# EAGLE board ftPwrDrive_2v9a (EAGLE 9.0.0), part 1 of 2
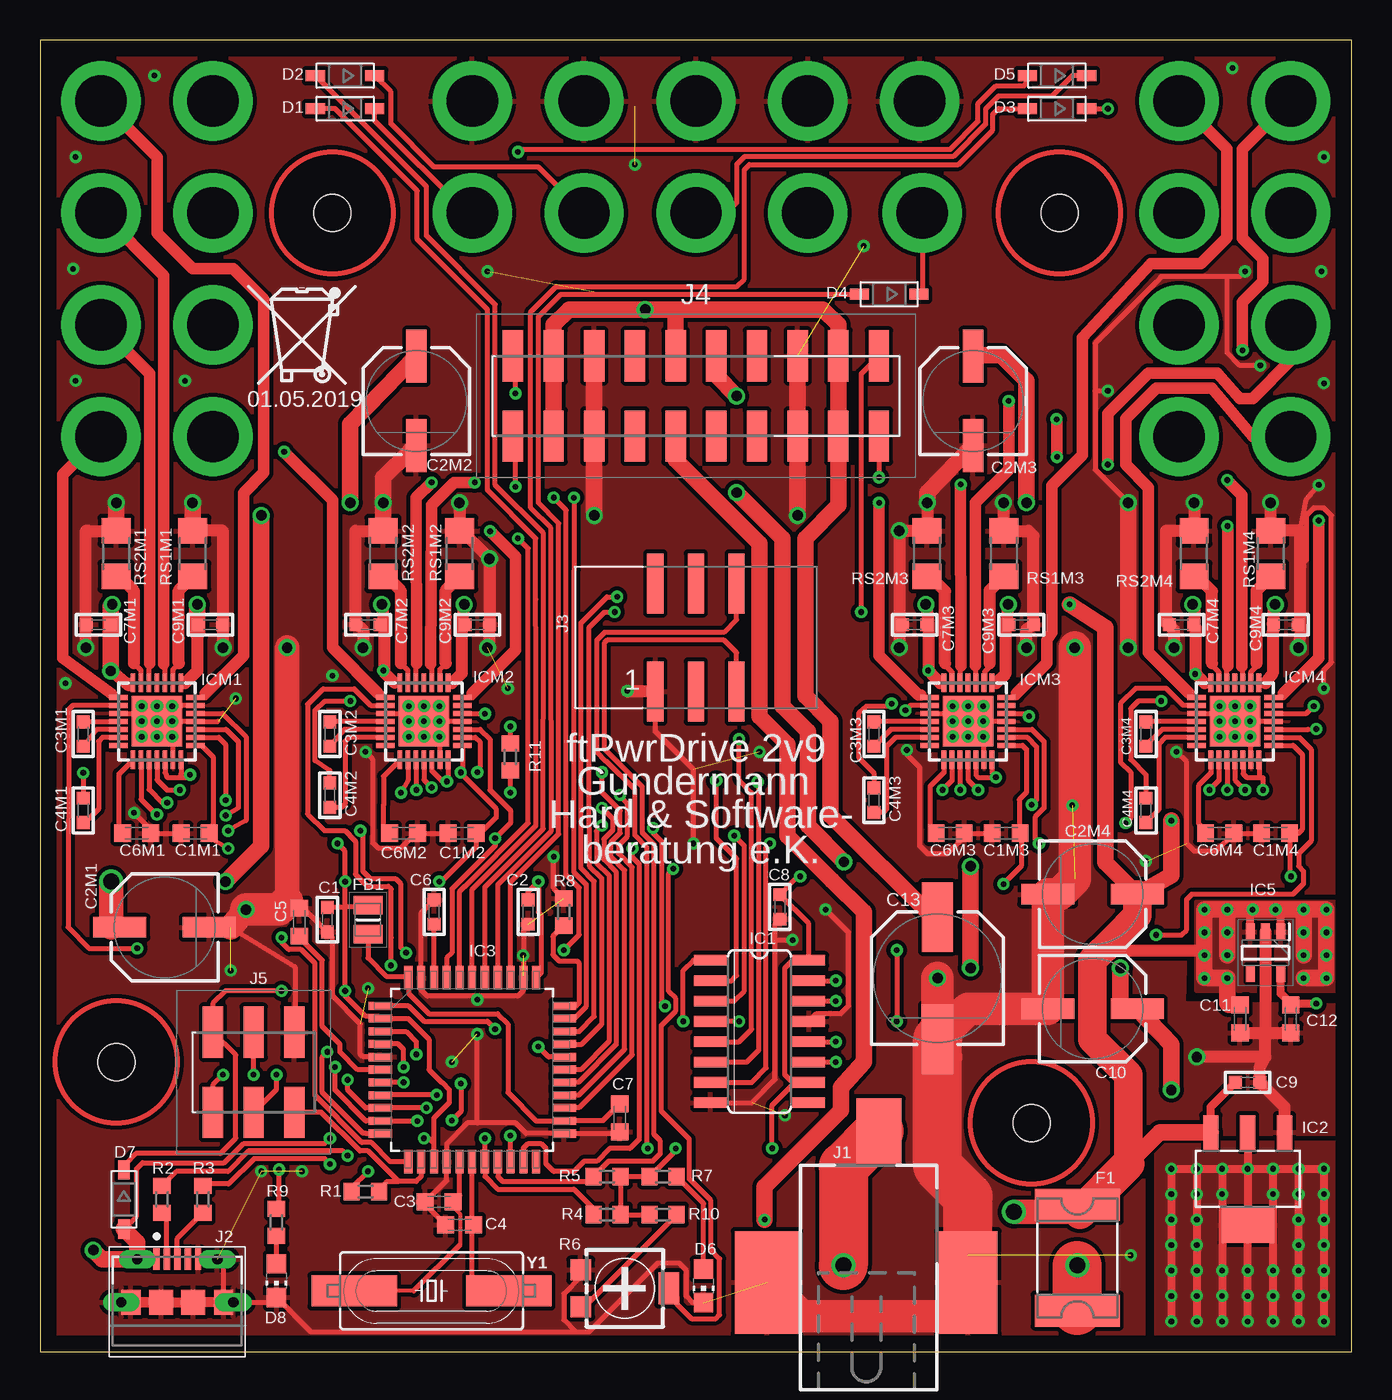
[diagram p0: board, top side]
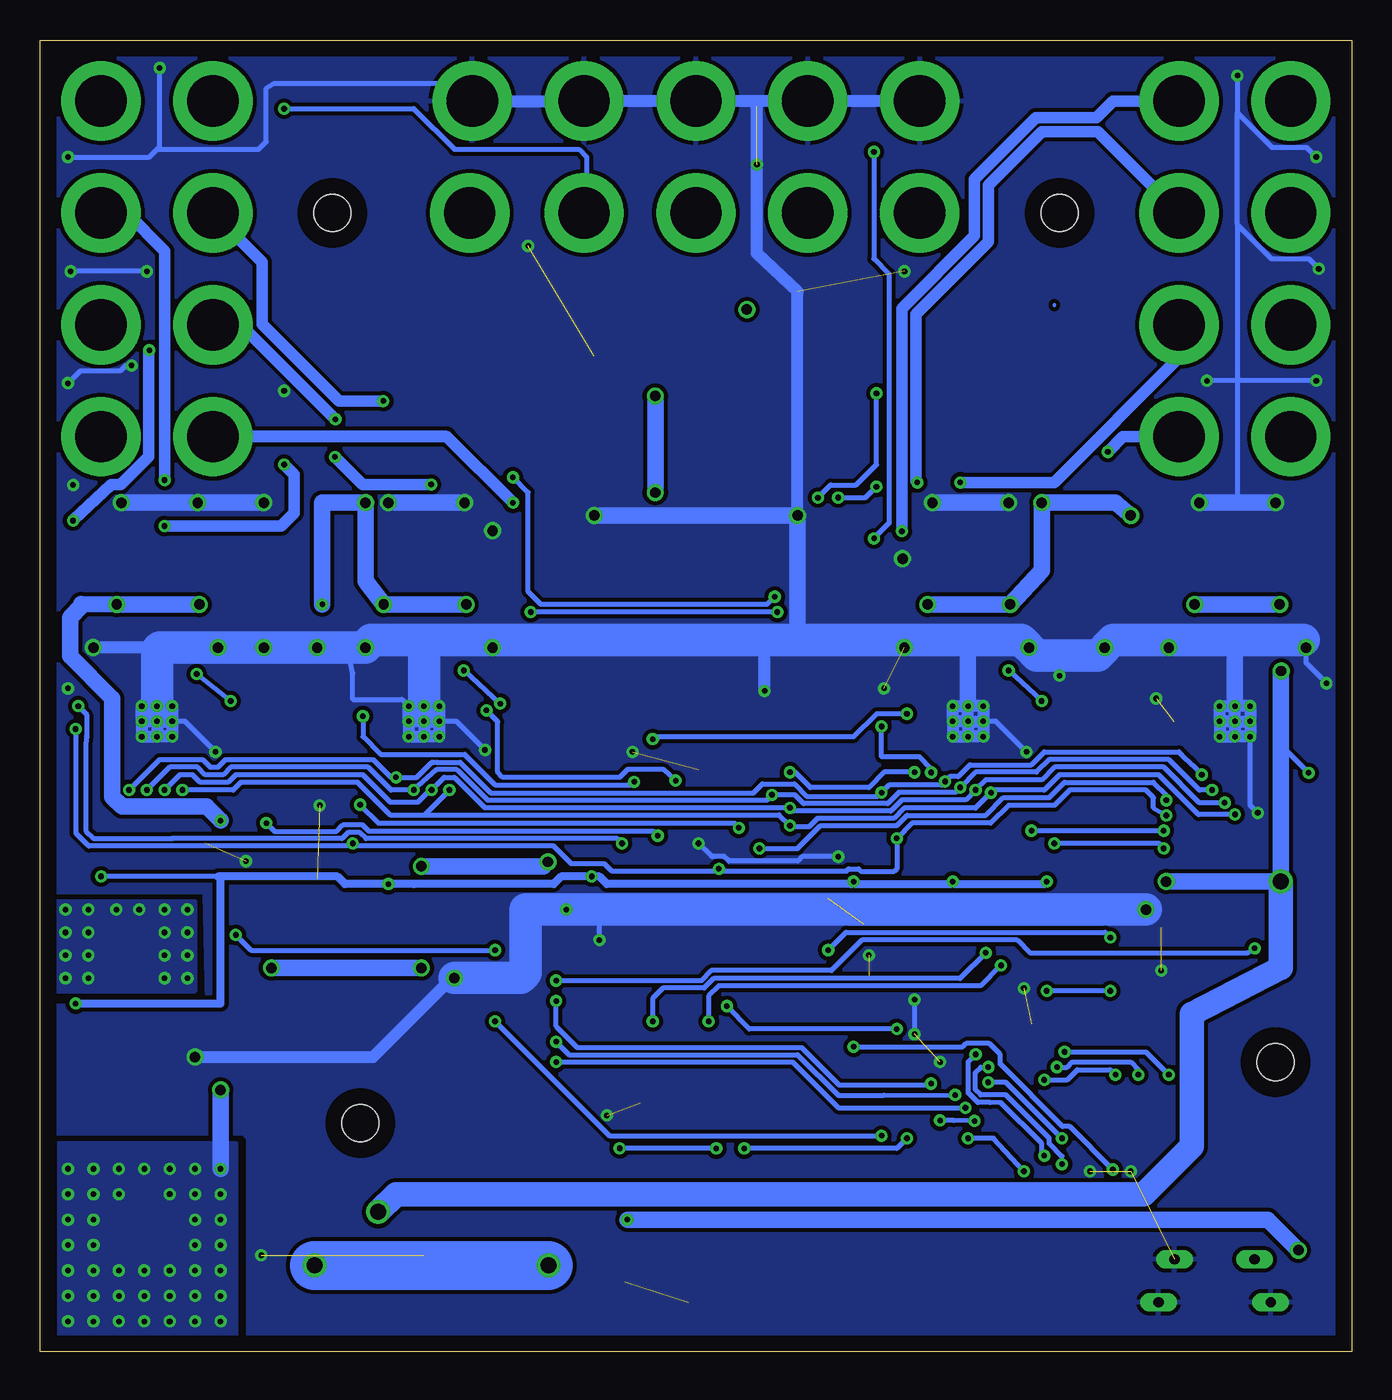
[diagram p1: board, bottom side, seen from below]

Size 81.92 x 81.92 mm. Coordinates in mm from the lower left corner, seen from the top.
Outline: 0,0 81.92,0 81.92,81.92 0,81.91 0,0
Copper layers (1*16): Top 0.035mm / dielectric 1.5mm / Bottom 0.035mm
Design rules "default": minimum track width 6mil, minimum drill 0.35mm, track to track 6mil, track to pad 6mil, pad to pad 6mil, via to via 6mil, smd to smd 6mil, copper to edge 40mil, drill to drill 6mil, minimum pad ring 10mil, minimum via ring 8mil, stop-mask expansion 4mil, vias tented up to drill 0mil, thermal gap 10mil
Net classes: 2 gnd: width 0.254 mm, drill 0.61 mm, clearance 0.254 mm; 3 usbvcc: width 0.254 mm, drill 0.61 mm, clearance 0.254 mm; 4 aref: width 0.254 mm, drill 0.61 mm, clearance 0.254 mm
Holes 2.3 mm at 18.26,71.12 63.66,71.12 61.91,14.29 4.76,18.1

## Footprints (pad centres in the part's own frame; a part is rotated, then mirrored left to right if it is on the bottom)
BUNDHUELSE = drill 3.2 pad 4.953: P$1 0,0
C0603 = smd 0.8 x 0.8: 1 -0.762,0; 2 0.762,0
C0603K = smd 1.05 x 1.08: 1 -0.875,0; 2 0.875,0
CSV-D = smd 3.302 x 1.27: + -2.794,0; - 2.794,0
CSV-E/F = smd 4.318 x 1.93: + -3.81,0; - 3.81,0
SOD-123 = smd 1.2 x 0.7: A 1.85,0; C -1.85,0
CHIP-LED0805 = smd 1.2 x 1.2: A 0,-1.05; C 0,1.05
2920L = smd 2 x 5.3: 1 -3.3,0; 2 3.3,0
BEADC2016X130N = smd 1.15 x 1.8: 1 -0.9,0; 2 0.9,0
SO16 = smd 0.66 x 2.032: 1 -4.445,-3.073; 2 -3.175,-3.073; 3 -1.905,-3.073; 4 -0.635,-3.073; 5 0.635,-3.073; 6 1.905,-3.073; 7 3.175,-3.073; 8 4.445,-3.073; 9 4.445,3.073; 10 3.175,3.073; 11 1.905,3.073; 12 0.635,3.073; 13 -0.635,3.073; 14 -1.905,3.073; 15 -3.175,3.073; 16 -4.445,3.073
SOT223 = smd 0.95 x 2.15: 1 -2.3,-2.9; 2 0,-2.9; 3 2.3,-2.9 | smd 3.25 x 2.15: 4 0,2.9
QFP80P1200X1200X120-44N = smd 1.473 x 0.508: 1 -5.74,3.988; 2 -5.74,3.2; 3 -5.74,2.388; 4 -5.74,1.6; 5 -5.74,0.787; 6 -5.74,0; 7 -5.74,-0.787; 8 -5.74,-1.6; 9 -5.74,-2.388; 10 -5.74,-3.2; 11 -5.74,-3.988; 23 5.74,-3.988; 24 5.74,-3.2; 25 5.74,-2.388; 26 5.74,-1.6; 27 5.74,-0.787; 28 5.74,0; 29 5.74,0.787; 30 5.74,1.6; 31 5.74,2.388; 32 5.74,3.2; 33 5.74,3.988 | smd 0.508 x 1.473: 12 -3.988,-5.74; 13 -3.2,-5.74; 14 -2.388,-5.74; 15 -1.6,-5.74; 16 -0.787,-5.74; 17 0,-5.74; 18 0.787,-5.74; 19 1.6,-5.74; 20 2.388,-5.74; 21 3.2,-5.74; 22 3.988,-5.74; 34 3.988,5.74; 35 3.2,5.74; 36 2.388,5.74; 37 1.6,5.74; 38 0.787,5.74; 39 0,5.74; 40 -0.787,5.74; 41 -1.6,5.74; 42 -2.388,5.74; 43 -3.2,5.74; 44 -3.988,5.74
SOT95P280X100-5N = smd 1.05 x 0.55: 1 -1.3,0.95; 2 -1.3,0; 3 -1.3,-0.95; 4 1.3,-0.95; 5 1.3,0.95
QFN28ET = smd 1.15 x 0.3: 1 -2.4,1.5; 2 -2.4,1; 3 -2.4,0.5; 4 -2.4,0; 5 -2.4,-0.5; 6 -2.4,-1; 7 -2.4,-1.5; 15 2.4,-1.5; 16 2.4,-1; 17 2.4,-0.5; 18 2.4,0; 19 2.4,0.5; 20 2.4,1; 21 2.4,1.5 | smd 0.3 x 1.15: 8 -1.5,-2.4; 9 -1,-2.4; 10 -0.5,-2.4; 11 0,-2.4; 12 0.5,-2.4; 13 1,-2.4; 14 1.5,-2.4; 22 1.5,2.4; 23 1,2.4; 24 0.5,2.4; 25 0,2.4; 26 -0.5,2.4; 27 -1,2.4; 28 -1.5,2.4 | smd 3.15 x 3.15: EXP 0,0
RASM7X2 = smd 4 x 6.4: P$1 -6.2,-3.6 | smd 3.7 x 6.4: P$2 6.35,-3.6 | smd 2.8 x 4.06: P$3 0.8,5.85
AMPHENOL_10118194-0001LF_0 = smd 0.4 x 1.35: 1 -1.3,2.615; 2 -0.65,2.615; 3 0,2.615; 4 0.65,2.615; 5 1.3,2.615 | drill 0.635 pad 1.067 long: 6 -2.5,2.615; 7 2.5,2.615; 8 -3.5,-0.085; 11 3.5,-0.085 | smd 1.2 x 1.55: 8-2 -2.9,-0.085; 11-2 2.9,-0.085 | smd 1.5 x 1.55: 9 -1,-0.085; 10 1,-0.085
SMTHEADER06 = smd 1 x 3.75: 1 -5.08,-3.375; 2 -5.08,3.375; 3 -2.54,-3.375; 4 -2.54,3.375; 5 0,-3.375; 6 0,3.375
SMD_HEADER_2X10 = smd 1.27 x 3.2: 1 -11.43,-2.5; 2 -11.43,2.5; 3 -8.89,-2.5; 4 -8.89,2.5; 5 -6.35,-2.5; 6 -6.35,2.5; 7 -3.81,-2.5; 8 -3.81,2.5; 9 -1.27,-2.5; 10 -1.27,2.5; 11 1.27,-2.5; 12 1.27,2.5; 13 3.81,-2.5; 14 3.81,2.5; 15 6.35,-2.5; 16 6.35,2.5; 17 8.89,-2.5; 18 8.89,2.5; 19 11.43,-2.5; 20 11.43,2.5
SMD_HEADER_2X03 = smd 1.27 x 3.2: 1 -2.54,-2.5; 2 -2.54,2.5; 3 0,-2.5; 4 0,2.5; 5 2.54,-2.5; 6 2.54,2.5
R0603 = smd 1 x 1.1: 1 -0.85,0; 2 0.85,0
RTRIM4G/J = smd 1.3 x 1.3: 1 -1.15,-2.75; 3 1.15,-2.75 | smd 2 x 1.3: 2 0,2.75
R1206 = smd 1.6 x 1.803: 1 -1.422,0; 2 1.422,0
HC49UP = smd 5.334 x 1.93: 1 -4.826,0; 2 4.826,0

## Placement (x,y rotation side)
1AM1  BUNDHUELSE2  [BUNDHUELSE]  3.81,71.12 0 top
1AM2  BUNDHUELSE2  [BUNDHUELSE]  10.79,71.12 0 top
1AM3  BUNDHUELSE2  [BUNDHUELSE]  71.12,71.12 0 top
1AM4  BUNDHUELSE2  [BUNDHUELSE]  78.11,71.12 0 top
1BM1  BUNDHUELSE2  [BUNDHUELSE]  3.81,78.11 0 top
1BM2  BUNDHUELSE2  [BUNDHUELSE]  10.79,78.11 0 top
1BM3  BUNDHUELSE2  [BUNDHUELSE]  71.12,78.11 0 top
1BM4  BUNDHUELSE2  [BUNDHUELSE]  78.11,78.11 0 top
2AM1  BUNDHUELSE2  [BUNDHUELSE]  3.81,64.14 0 top
2AM2  BUNDHUELSE2  [BUNDHUELSE]  10.79,64.14 0 top
2AM3  BUNDHUELSE2  [BUNDHUELSE]  71.12,64.14 0 top
2AM4  BUNDHUELSE2  [BUNDHUELSE]  78.11,64.14 0 top
2BM1  BUNDHUELSE2  [BUNDHUELSE]  3.81,57.15 0 top
2BM2  BUNDHUELSE2  [BUNDHUELSE]  10.79,57.15 0 top
2BM3  BUNDHUELSE2  [BUNDHUELSE]  71.12,57.15 0 top
2BM4  BUNDHUELSE2  [BUNDHUELSE]  78.11,57.15 0 top
C1  100nF  [C0603]  17.94,26.99 90 top
C1M1  220nF  [C0603K]  9.68,32.38 0 top
C1M2  220nF  [C0603K]  26.35,32.38 0 top
C1M3  220nF  [C0603K]  60.33,32.38 0 top
C1M4  220nF  [C0603K]  77.15,32.38 0 top
C2  100nF  [C0603]  30.48,27.46 90 top
C2M1  100uF  [CSV-D]  7.78,26.51 0 top
C2M2  100uF  [CSV-D]  23.5,59.37 270 top
C2M3  100uF  [CSV-D]  58.26,59.37 270 top
C2M4  100uF  [CSV-D]  65.72,28.57 180 top
C3  22pF  [C0603K]  24.92,9.37 180 top
C3M1  100nF  [C0603]  2.7,38.58 270 top
C3M2  100nF  [C0603]  18.1,38.58 270 top
C3M3  100nF  [C0603]  52.07,38.58 270 top
C3M4  100nF  [C0603]  69.06,38.58 270 top
C4  22pF  [C0603K]  26.19,7.94 180 top
C4M1  100nF  [C0603]  2.7,33.81 90 top
C4M2  100nF  [C0603]  18.1,34.77 90 top
C4M3  100nF  [C0603]  52.07,34.45 90 top
C4M4  100nF  [C0603]  69.06,33.81 90 top
C5  1uF  [C0603K]  16.19,26.83 270 top
C6  100nF  [C0603]  24.61,27.46 270 top
C6M1  220nF  [C0603K]  6.03,32.38 180 top
C6M2  220nF  [C0603K]  22.7,32.38 180 top
C6M3  220nF  [C0603K]  56.83,32.38 180 top
C6M4  220nF  [C0603K]  73.66,32.38 180 top
C7  1uF  [C0603K]  36.2,14.61 90 top
C7M1  100nF  [C0603]  3.65,45.4 0 top
C7M2  100nF  [C0603]  20.48,45.4 0 top
C7M3  100nF  [C0603]  54.61,45.4 0 top
C7M4  100nF  [C0603]  71.28,45.4 0 top
C8  100nF  [C0603]  46.2,27.78 90 top
C9  100nF  [C0603]  75.41,16.83 180 top
C9M1  100nF  [C0603]  10.64,45.4 180 top
C9M2  100nF  [C0603]  27.3,45.4 180 top
C9M3  100nF  [C0603]  61.28,45.4 180 top
C9M4  100nF  [C0603]  77.79,45.4 180 top
C10  100uF  [CSV-D]  65.72,21.43 180 top
C11  1uF  [C0603K]  74.93,20.8 90 top
C12  1uF  [C0603K]  78.11,20.8 270 top
C13  470uF  [CSV-E/F]  56.04,23.34 270 top
D1  MBR0520  [SOD-123]  19.05,77.63 180 top
D2  MBR0520  [SOD-123]  19.05,79.69 180 top
D3  MBR0520  [SOD-123]  63.5,77.63 180 top
D4  MBR0520  [SOD-123]  53.02,66.04 180 top
D5  MBR0520  [SOD-123]  63.5,79.69 180 top
D6  LED RED  [CHIP-LED0805]  41.43,4.13 180 top
D7  MBR0520  [SOD-123]  5.24,9.53 270 top
D8  LED RED  [CHIP-LED0805]  14.76,4.45 180 top
EMS+  BUNDHUELSE2  [BUNDHUELSE]  40.96,71.12 0 top
EMS-  BUNDHUELSE2  [BUNDHUELSE]  40.96,78.11 0 top
ES1+  BUNDHUELSE2  [BUNDHUELSE]  26.99,71.12 0 top
ES1-  BUNDHUELSE2  [BUNDHUELSE]  33.97,78.11 0 top
ES2+  BUNDHUELSE2  [BUNDHUELSE]  33.97,71.12 0 top
ES2-  BUNDHUELSE2  [BUNDHUELSE]  47.94,78.11 0 top
ES3+  BUNDHUELSE2  [BUNDHUELSE]  47.94,71.12 0 top
ES3-  BUNDHUELSE2  [BUNDHUELSE]  26.99,78.11 0 top
ES4+  BUNDHUELSE2  [BUNDHUELSE]  55.09,71.12 0 top
ES4-  BUNDHUELSE2  [BUNDHUELSE]  54.93,78.11 0 top
F1  2920L200/24  [2920L]  64.77,5.87 270 top
FB1  MH2029-300Y  [BEADC2016X130N]  20.48,26.99 90 top
IC1  74HC595D  [SO16]  44.93,20 270 top
IC2  LM1117MP-5.0  [SOT223]  75.41,10.79 180 top
IC3  ATMEGA32U4-AU  [QFP80P1200X1200X120-44N]  26.99,17.62 0 top
IC5  NCP718BSN500T1G  [SOT95P280X100-5N]  76.52,24.92 270 top
ICM1  A4988  [QFN28ET]  7.3,39.37 0 top
ICM2  A4988  [QFN28ET]  23.97,39.37 0 top
ICM3  A4988  [QFN28ET]  57.94,39.37 0 top
ICM4  A4988  [QFN28ET]  74.61,39.37 0 top
J1  12V  [RASM7X2]  51.59,7.94 0 top
J2  AMPHENOL_10118194-0001LFAMPHENOL_10118194-0001LF_0_0  [AMPHENOL_10118194-0001LF_0]  8.57,3.17 0 top
J3  I2C TX/ftDuino  [SMTHEADER06]  43.5,44.61 0 top
J4  SMD_HEADER_2X10  [SMD_HEADER_2X10]  40.96,59.69 0 top
J5  SMD_HEADER_2X03  [SMD_HEADER_2X03]  13.34,17.46 0 top
R1  10k  [R0603]  20.32,10 180 top
R2  22  [R0603]  7.62,9.53 270 top
R3  22  [R0603]  10.16,9.53 270 top
R4  10k  [R0603]  35.4,8.57 0 top
R5  10k  [R0603]  35.4,10.95 0 top
R6  2k  [RTRIM4G/J]  36.51,3.97 270 top
R7  390  [R0603]  38.89,10.95 180 top
R8  10k  [R0603]  32.7,27.46 270 top
R9  390  [R0603]  14.76,8.1 90 top
R10  15k  [R0603]  38.89,8.57 180 top
R11  10k  [R0603]  29.37,37.15 90 top
RS1M1  0.068  [R1206]  9.54,49.85 270 top
RS1M2  0.068  [R1206]  26.21,49.85 270 top
RS1M3  0.068  [R1206]  60.18,49.85 270 top
RS1M4  0.068  [R1206]  76.85,49.85 270 top
RS2M1  0.068  [R1206]  4.75,49.85 270 top
RS2M2  0.068  [R1206]  21.42,49.85 270 top
RS2M3  0.068  [R1206]  55.39,49.85 270 top
RS2M4  0.068  [R1206]  72.06,49.85 270 top
U$9  [ROHS_BIN]  16.35,63.82 0 top
Y1  16MHz  [HC49UP]  24.45,3.81 0 top

## Library data of the parts
1AM1-1AM4 1BM1-1BM4 2AM1-2AM4 2BM1-2BM4 EMS+ EMS- ES1+ ES1- ES2+ ES2- ES3+ ES3- ES4+ ES4- J3 = sflib
C1 C2 C2M1-C2M4 C3M1-C3M4 C4M1-C4M4 C6 C7M1-C7M4 C8 C9 C9M1-C9M4 C10 C13 = rc-master-smd
C1M1-C1M4 C3-C5 C6M1-C6M4 C7 C11 C12 = rcl; SPICEPREFIX: C
D1-D5 D7 = adafruit
D6 D8 = led
F1 = polyfuse-smd_20; MF: Littelfuse; MPN: 2920L200/24; OC_FARNELL: 2309127; OC_NEWARK: 05M2797
FB1 = MH2029-300Y; ALLIED_NUMBER: 71024701; ALLIED_PRICE-STOCK: https://www.alliedelec.com/bourns-mh2029-300y/71024701/; DESCRIPTION: EMI Filter Beads, Chips & Arrays Impedance 30ohms IDC 3.0; HEIGHT: 1.3mm; MANUFACTURER_NAME: Bourns; MANUFACTURER_PART_NUMBER: MH2029-300Y; MOUSER_PART_NUMBER: 652-MH2029-300Y; MOUSER_PRICE-STOCK: https://www.mouser.com/Search/Refine.aspx?Keyword=652-MH2029-300Y; RS_PART_NUMBER: 1814464; RS_PRICE-STOCK: http://uk.rs-online.com/web/p/products/1814464
IC1 = 74xx-eu
IC2 = lm1117_10; MF: Texas Instruments; MPN: LM1117MP-5.0; OC_FARNELL: 9778209; OC_NEWARK: 28X3417
IC3 = ATMEGA32U4-AU; AVAILABILITY: Unavailable; DESCRIPTION: MCU 8-bit ATmega AVR RISC 32KB Flash 3.3V/5V 44-Pin TQFP; MF: Microchip; MP: ATMEGA32U4-AU; PACKAGE: TQFP-44 Microchip; PRICE: None
IC5 = NCP718BSN500T1G; DESCRIPTION: 300 MA LOW IQ, WIDE INPUT; HEIGHT: 1mm; MANUFACTURER_NAME: ON Semiconductor; MANUFACTURER_PART_NUMBER: NCP718BSN500T1G; MOUSER_PART_NUMBER: 863-NCP718BSN500T1G; MOUSER_PRICE-STOCK: https://www.mouser.com/Search/Refine.aspx?Keyword=863-NCP718BSN500T1G
ICM1-ICM4 = allegro; MPN: A4983SETTR-T; OC_FARNELL: 1688956; OC_NEWARK: 39M6763
J1 = RASM7X2; OC_FARNELL: unknown; OC_NEWARK: unknown
J2 = Amphenol - 10118194-0001LF; AC_DURABILITY_(MATING_CYCLES): 10000 Mating Cycles; CENTROID_NOT_SPECIFIED: No; CURRENT_RATING: 1.8A per contact; DATASHEET: http://portal.fciconnect.com/Comergent//fci/drawing/10118194.pdf; DIGIKEY_DESCRIPTION: CONN USB MICRO B RECPT SMT R/A; DIGIKEY_PART_NUMBER: 609-4618-1-ND; IMPORTED_FROM: octopart; IS_FEMALE: yes; LEAD_FREE: yes; MANUFACTURER_PRODUCT_PAGE: http://www.amphenol-icc.com/micro-usb-101181940001lf.html; MF: Amphenol; MOUSER_PART_NUMBER: 649-10118194-0001LF; MPN: 10118194-0001LF; PACKAGE: CONN_USB; PREFIX: J; PRODUCT_SPECIFICATION: http://www.amphenol-icc.com/media/wysiwyg/files/documentation/gs-12-641.pdf; RESISTANCE_(CONTACT)_INITIAL: 30 m-Ω max|After test delta: 10 m-Ω max change; RESISTANCE_(INSULATION)_INITIAL: 1000 M-Ω Min.|After test: 100 M-Ω Min.; ROHS: yes; TEMPERATURE_RANGE_HIGH: +80°C; TEMPERATURE_RANGE_LOW: -30°C; VOLTAGE_RATING: 100V
J4 J5 = sfu_smd_header
R1-R5 R8 R10 R11 RS1M1-RS1M4 RS2M1-RS2M4 = rcl; SPICEPREFIX: R
R6 = rcl; SPICEMODEL: X; SPICEPREFIXL: POT
R7 R9 = resistor
U$9 = recylcle
Y1 = SparkFun-Clocks

## Nets
1AM1: 1AM1.P$1 ICM1.24
1AM2: 1AM2.P$1 ICM2.24
1AM3: 1AM3.P$1 ICM3.24
1AM4: 1AM4.P$1 ICM4.24
1BM1: 1BM1.P$1 ICM1.21
1BM2: 1BM2.P$1 ICM2.21
1BM3: 1BM3.P$1 ICM3.21
1BM4: 1BM4.P$1 ICM4.21
2AM1: 2AM1.P$1 ICM1.26
2AM2: 2AM2.P$1 ICM2.26
2AM3: 2AM3.P$1 ICM3.26
2AM4: 2AM4.P$1 ICM4.26
2BM1: 2BM1.P$1 ICM1.1
2BM2: 2BM2.P$1 ICM2.1
2BM3: 2BM3.P$1 ICM3.1
2BM4: 2BM4.P$1 ICM4.1
12V: F1.2 J1.P$3
+5V [usbvcc]: C1.2 C1M1.2 C1M2.2 C1M3.2 C1M4.2 C2.2 C8.2 C12.1 D7.C FB1.2 IC1.10 IC1.16 IC3.2 IC3.14 IC3.34 IC5.5 ICM1.15 ICM2.15 ICM3.15 ICM4.15 J5.2 R1.2 R4.2 R5.2 R7.2 R10.2 R11.2
A0/ESM4: D4.A IC3.36
A1/ESM3: D3.A IC3.37
A2/ESM2: D2.A IC3.38
A3/ESM1: D1.A IC3.39
A4/EMS: D5.A IC3.40
A5/MREF: IC3.41 ICM1.17 ICM2.17 ICM3.17 ICM4.17 R6.2
D0/RX/M4STEP: IC3.20 ICM4.16
D1/TX/M1STEP: IC3.21 ICM1.16
D2/SDA: IC3.19 J3.5 R5.1
D3/SCL: IC3.18 J3.6 R4.1
D4/MS3: IC3.25 ICM1.11 ICM2.11 ICM3.11 ICM4.11
D5*/PWM1: IC3.31 J4.19
D6*/MS2: IC3.27 ICM1.10 ICM2.10 ICM3.10 ICM4.10
D7/M3STEP: IC3.1 ICM3.16
D+: IC3.4 R3.1
D-: IC3.3 R2.1
ES1+: D1.C ES1+.P$1
ES1+1: D5.C EMS+.P$1
ES2+: D2.C ES2+.P$1
ES3+: D3.C ES3+.P$1
ES4+: D4.C ES4+.P$1
GND [gnd]: C1.1 C1M1.1 C1M2.1 C1M3.1 C1M4.1 C2.1 C2M1.- C2M2.- C2M3.- C2M4.- C3.2 C4.2 C5.1 C6.1 C6M1.1 C6M2.1 C6M3.1 C6M4.1 C7.1 C7M1.1 C7M2.1 C7M3.1 C7M4.1 C8.1 C9.1 C9M1.1 C9M2.1 C9M3.1 C9M4.1 C10.- C11.1 C12.2 C13.- D6.C D8.C EMS-.P$1 ES1-.P$1 ES2-.P$1 ES3-.P$1 ES4-.P$1 IC1.8 IC1.13 IC2.1 IC3.5 IC3.15 IC3.23 IC3.35 IC3.43 IC5.2 ICM1.3 ICM1.13 ICM1.18 ICM1.20 ICM1.EXP ICM2.3 ICM2.13 ICM2.18 ICM2.EXP ICM3.3 ICM3.13 ICM3.18 ICM3.EXP ICM4.3 ICM4.13 ICM4.18 ICM4.EXP J1.P$1 J1.P$2 J2.5 J2.7 J2.8 J2.8-2 J2.9 J2.10 J2.11 J2.11-2 J3.1 J4.5 J4.6 J4.15 J4.16 J5.6 R6.1 R8.1 RS1M1.1 RS1M2.1 RS1M3.1 RS1M4.1 RS2M1.1 RS2M2.1 RS2M3.1 RS2M4.1
HI: ICM1.12 ICM1.14 ICM2.12 ICM2.14 ICM3.12 ICM3.14 ICM4.12 ICM4.14 R11.1
HWB: IC3.33 R8.2
IO8/MS1: IC3.28 ICM1.9 ICM2.9 ICM3.9 ICM4.9
IO9*: IC3.29 R9.2
IO10*/PWM2: IC3.30 J4.20
IO11*/PWM3: IC3.12 J4.1
IO12/M2STEP: IC3.26 ICM2.16
IO13*/PWM4: IC3.32 J4.2
M1DIR: IC1.4 ICM1.19
M1EN: IC1.15 ICM1.2
M2DIR: IC1.5 ICM2.19
M2EN: IC1.1 ICM2.2
M3DIR: IC1.6 ICM3.19
M3EN: IC1.2 ICM3.2
M4DIR: IC1.7 ICM4.19
M4EN: IC1.3 ICM4.2
MISO: IC3.11 J5.1
MOSI: IC1.14 IC3.10 J5.4
N$1: J2.2 R2.2
N$2: J2.3 R3.2
N$4: D8.A R9.1
N$6: R6.3 R10.1
N$10: C5.2 IC3.6
N$23: C7.2 FB1.1 IC3.24 IC3.44
N$28: C6.2 IC3.42
N$99: D6.A R7.1
RESET: IC3.13 J5.5 R1.1
SCK: IC1.11 IC3.9 J5.3
SS/RXLED: IC1.12 IC3.8
TXLED: IC3.22
V+: C13.+ J4.3 J4.4 J4.10 J4.17 J4.18
VBUS: D7.A IC3.7 J2.1 J2.6 J4.9
VINT: C10.+ IC2.2 IC2.4 J4.12
VMOT: C2M1.+ C2M2.+ C2M3.+ C2M4.+ C4M1.2 C4M2.2 C4M3.2 C4M4.2 C7M1.2 C7M2.2 C7M3.2 C7M4.2 C9.2 C9M1.2 C9M2.2 C9M3.2 C9M4.2 C11.2 F1.1 IC2.3 IC5.1 IC5.3 ICM1.22 ICM1.28 ICM2.22 ICM2.28 ICM3.22 ICM3.28 ICM4.22 ICM4.28
XCP1: C3M1.1 ICM1.4
XCP2: C3M1.2 ICM1.5
XCP5: C3M2.1 ICM2.4
XCP6: C3M2.2 ICM2.5
XCP7: C3M3.1 ICM3.4
XCP8: C3M3.2 ICM3.5
XCP9: C3M4.1 ICM4.4
XCP10: C3M4.2 ICM4.5
XSENSE1: ICM1.23 RS1M1.2
XSENSE2: ICM1.27 RS2M1.2
XSENSE5: ICM2.27 RS2M2.2
XSENSE6: ICM2.23 RS1M2.2
XSENSE7: ICM3.27 RS2M3.2
XSENSE8: ICM3.23 RS1M3.2
XSENSE9: ICM4.27 RS2M4.2
XSENSE10: ICM4.23 RS1M4.2
XTAL1: C4.1 IC3.17 Y1.2
XTAL2: C3.1 IC3.16 Y1.1
XVCP: C4M1.1 ICM1.6
XVCP2: C4M2.1 ICM2.6
XVCP3: C4M3.1 ICM3.6
XVCP4: C4M4.1 ICM4.6
XVREG: C6M1.2 ICM1.8
XVREG2: C6M2.2 ICM2.8
XVREG3: C6M3.2 ICM3.8
XVREG4: C6M4.2 ICM4.8